# EAGLE board PL-N823-01 Analog Breakout (EAGLE 9.3.0)
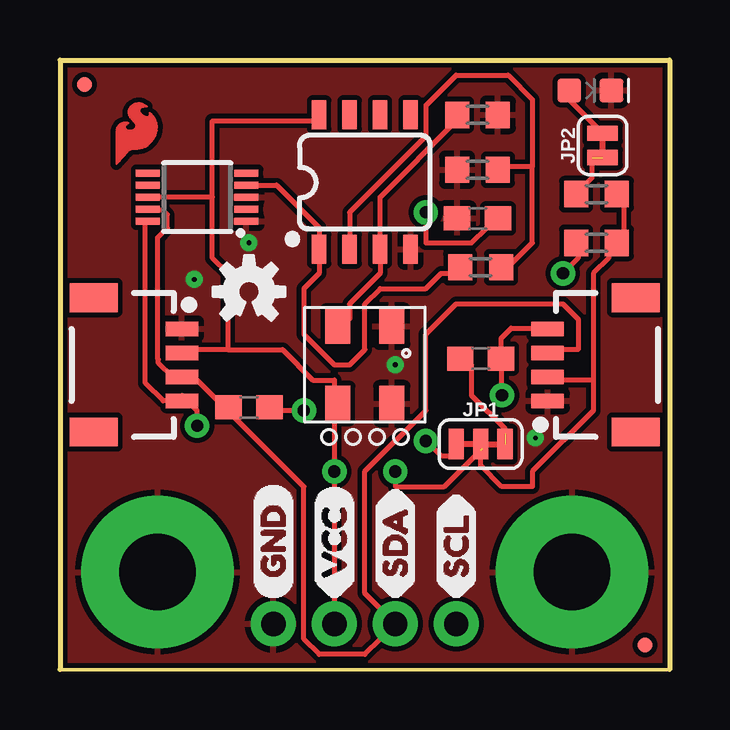
[diagram p0: board, top side]
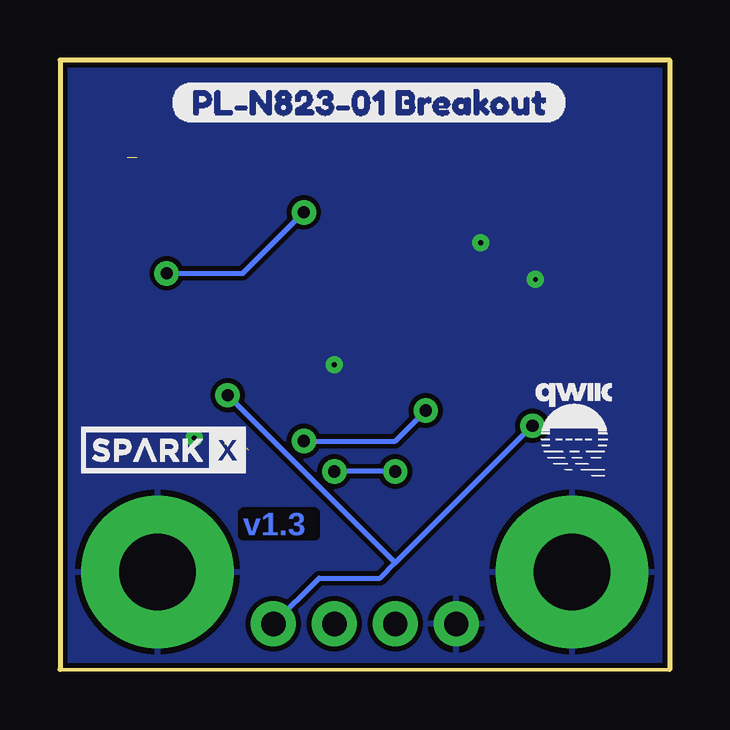
[diagram p1: board, bottom side, seen from below]

Size 25.4 x 25.4 mm. Coordinates in mm from the lower left corner, seen from the top.
Outline: 0,25.4 25.4,25.4 25.4,0 0,0 0,25.4
Copper layers (1*16): Top 0.035mm / dielectric 1.5mm / Bottom 0.035mm
Design rules "SparkFun": minimum track width 8mil, minimum drill 20mil, track to track 8mil, track to pad 8mil, pad to pad 8mil, via to via 8mil, smd to smd 8mil, copper to edge 8mil, drill to drill 8mil, minimum pad ring 12mil, minimum via ring 10mil, stop-mask expansion 4mil, vias tented up to drill 20mil, thermal gap 10mil

## Footprints (pad centres in the part's own frame; a part is rotated, then mirrored left to right if it is on the bottom)
C0603 = smd 1.1 x 1: 1 -0.85,0; 2 0.85,0
LED-0603 = smd 1 x 1: A -0.877,0; C 0.877,0
FIDUCIAL-MICRO = smd 0.635 x 0.635: 1 0,0
STANDOFF-ELECTRICAL = drill 3.2 pad 6.35: P1 0,0
1X04_1MM_RA = smd 0.6 x 1.35: 1 -1.5,0; 2 -0.5,0; 3 0.5,0; 4 1.5,0 | smd 1.2 x 2: NC1 2.8,-3.675; NC2 -2.8,-3.675
1X04_NO_SILK = drill 1.016 pad 1.88: 1 0,0; 2 2.54,0; 3 5.08,0; 4 7.62,0
SMT-JUMPER_3_2-NC_TRACE_SILK = smd 0.635 x 1.27: 1 -1.016,0; 2 0,0; 3 1.016,0
SMT-JUMPER_2_NC_TRACE_SILK = smd 0.635 x 1.27: 1 -0.508,0; 2 0.508,0
R0603 = smd 1 x 1.1: 1 -0.85,0; 2 0.85,0
0603 = smd 1.1 x 1: 1 -0.85,0; 2 0.85,0
MSOP10 = smd 0.3 x 1: 1 -1,-2.05; 2 -0.5,-2.05; 3 0,-2.05; 4 0.5,-2.05; 5 1,-2.05; 6 1,2.05; 7 0.5,2.05; 8 0,2.05; 9 -0.5,2.05; 10 -1,2.05
SO08 = smd 0.6 x 1.2: 1 -1.905,-2.8; 2 -0.635,-2.8; 3 0.635,-2.8; 4 1.905,-2.8; 5 1.905,2.8; 6 0.635,2.8; 7 -0.635,2.8; 8 -1.905,2.8
PL-N823-01 = smd 1.05 x 1.475: DRAIN -1.125,-1.613; GND@1 1.125,1.613; GND@2 1.125,-1.613; SOURCE -1.125,1.613

## Placement (x,y rotation side)
C2  1 uF  [C0603]  17.4,18.8 180 top
D1  BLUE  [LED-0603]  22.1,24.13 0 top
FD1  FIDUCIALUFIDUCIAL  [FIDUCIAL-MICRO]  1.02,24.38 0 top
FD2  FIDUCIALUFIDUCIAL  [FIDUCIAL-MICRO]  24.38,1.02 0 top
FRAME1  FRAME-LETTERNO_PACKAGE  [DUMMY]  20.32,3.17 0 top
H3  STANDOFF_ELECTRICAL  [STANDOFF-ELECTRICAL]  21.34,4.06 0 top
H4  STANDOFF_ELECTRICAL  [STANDOFF-ELECTRICAL]  4.06,4.06 0 top
J1  [1X04_1MM_RA]  5.08,12.7 270 top
J2  [1X04_NO_SILK]  16.51,1.91 180 top
J3  [1X04_1MM_RA]  20.32,12.7 90 top
JP1  JUMPER-SMT_3_2-NC_TRACE_SILK  [SMT-JUMPER_3_2-NC_TRACE_SILK]  17.53,9.4 0 top
JP2  JUMPER-SMT_2_NC_TRACE_SILK  [SMT-JUMPER_2_NC_TRACE_SILK]  22.61,21.84 90 top
R1  330  [R0603]  22.35,19.81 0 top
R2  10K  [R0603]  22.35,17.78 180 top
R3  47K  [R0603]  17.4,23.11 0 top
R4  2.49K  [R0603]  17.53,16.76 180 top
R5  1K  [R0603]  17.4,20.83 0 top
R6  2.2k  [0603]  7.87,10.92 180 top
R7  2.2k  [0603]  17.53,12.95 0 top
U1  ADS1015  [MSOP10]  5.71,19.68 90 top
U2  LMV358  [SO08]  12.7,20.32 0 top
U$1  PL-N823-01  [PL-N823-01]  12.7,12.7 0 top
U$2  [SFE_LOGO_FLAME_COPPER_EXPOSED_.1]  2.03,20.7 0 top
U$3  [GND0]  8.89,2.92 90 top
U$4  [SCL0]  16.51,2.92 90 top
U$5  [SDA0]  13.97,2.92 90 top
U$6  [VCC0]  11.43,2.92 90 top
U$7  [OSHW-LOGO-S]  7.87,15.75 0 top
U$8  [PL#N823#01_BREAKOUT0]  20.83,23.62 0 bottom
U$9  [QWIIC-LOGO-SMALL]  4.06,9.91 0 bottom
U$10  [SPARKX-SMALL]  21.08,9.14 0 bottom

## Library data of the parts
C2 = rcl; SPICEPREFIX: C
D1 = SparkFun-LED; PROD_ID: DIO-08575
FD1 FD2 U$2 U$7 = SparkFun-Aesthetics
FRAME1 = SparkFun-Aesthetics; DESIGNER: Nobody; VERSION: v01
H3 H4 = SparkFun-Hardware
J1 J3 = SparkFun-Connectors
J2 = SparkFun-Connectors; PROD_ID: CONN-09696
JP1 JP2 = SparkFun-Jumpers
R1-R5 = rcl; SPICEPREFIX: R
R6 R7 = SparkFun-Resistors; PROD_ID: RES-08272
U1 = SparkFun-IC-Conversion; PROD_ID: IC-12270
U2 = SparkFun-IC-Amplifiers; PROD_ID: IC-09657
U$1 = PL-N823-01
U$3 = buzzard_labels_GNS
U$4 = buzzard_labels_SCL
U$5 = buzzard_labels_SDA
U$6 = buzzard_labels_VCC
U$8 = buzzard_labels_pln82301
U$9 = Labels
U$10 = SparkX

## Nets
GND: C2.2 D1.C H3.P1 H4.P1 J1.1 J2.4 J3.1 R3.2 R5.1 U1.1 U1.3 U2.4 U$1.GND@1 U$1.GND@2
N$1: R4.1 R5.2 U2.2
N$2: C2.1 R2.2
N$3: JP2.1 R1.1
N$4: JP1.3 R7.1
N$5: JP1.1 R6.1
N$6: D1.A JP2.2
SCL: J1.4 J2.1 J3.4 R7.2 U1.10
SDA: J1.3 J2.2 J3.3 R6.2 U1.9
SIGNAL: R4.2 U1.4 U2.1
SOURCE: R3.1 U2.3 U$1.SOURCE
VCC: J1.2 J2.3 J3.2 JP1.2 R1.2 R2.1 U1.8 U2.8 U$1.DRAIN

## Tracks (layer width: path | path; a pad name or v marks a point on that pad's centre or on a via)
GND  (via drill 0.2)
  other vias: 13.97,12.7 19.81,9.65 5.59,16.26 7.87,17.78
  pour Top: 0,25.4 0,0 25.4,0 25.4,25.4
  pour Bottom: 0,0 0,25.4 25.4,25.4 25.4,0
N$1
  Top 0.203: 19.68,20.95 18.41,20.95 R5.2 | 19.68,20.95 19.68,17.78 18.41,16.51 R4.1 | U2.2 12.06,19.05 15.24,22.23 15.24,23.5 16.51,24.77 18.67,24.77 19.68,23.75 19.68,20.95
N$2  (via drill 0.51)
  Top 0.203: v15.24,19.05 15.24,17.78 17.14,17.78 17.78,18.41 C2.1 | v20.95,16.51 21.59,17.14 21.59,17.78 R2.2
  Bottom 0.203: v15.24,19.05 17.78,16.51 v20.95,16.51
N$3  (1 unrouted)
  Top 0.203: R1.1 22.17,20.48 22.17,21.34
N$4  (1 unrouted)
  Top 0.203: R7.1 17.14,12.7 17.14,11.43 18.54,10.03 18.54,9.83 | 18.41,8.89 JP1.3
N$5  (via drill 0.51)
  Top 0.203: v10.16,10.79 8.89,10.79 R6.1 | v15.24,9.53 15.88,8.89 16.51,8.89 JP1.1
  Bottom 0.203: v10.16,10.79 11.43,9.53 v15.24,9.53
N$6
  Top 0.203: JP2.2 21.22,23.74 D1.A
SCL  (via drill 0.51)
  Top 0.203: v5.71,10.16 5.71,10.79 5.08,11.43 J1.4 4.29,11.2 3.56,11.94 3.56,18.58 U1.10 | v18.41,11.43 18.41,12.7 R7.2 18.38,13.8 18.8,14.22 20.3,14.22 J3.4
  Bottom 0.203: 11.43,4.45 12.06,3.81 14.61,3.81 J2.1 | 11.43,4.45 v5.71,10.16 | 11.43,4.45 v18.41,11.43
SDA
  Top 0.203: 6.99,10.79 5.71,12.06 5.08,12.06 J1.3 4.67,12.2 4.1,12.77 4.1,12.92 4.06,12.95 4.06,18 4.47,18.41 4.47,18.96 4.29,19.14 3.71,19.14 U1.9 | 13.34,2.54 12.7,3.17 12.7,8.26 15.24,10.79 15.24,13.97 16.51,15.24 20.95,15.24 21.59,14.61 21.59,13.34 20.32,13.34 J3.3 | 6.99,10.79 10.16,7.62 10.16,1.27 10.79,0.64 12.7,0.64 13.34,1.27 13.34,2.54 | 6.99,10.79 R6.2 | 13.34,2.54 J2.2
SIGNAL
  Top 0.203: R4.2 16.51,16.51 15.88,16.51 15.24,15.88 13.34,15.88 12.7,15.24 12.7,13.34 12.06,12.7 11.43,12.7 10.16,13.97 10.16,15.88 10.79,16.51 U2.1 10.79,18.41 9.03,20.18 U1.4
SOURCE
  Top 0.203: R3.1 16.51,22.86 13.34,19.68 U2.3 13.34,16.51 12.06,15.24 12.06,14.61 U$1.SOURCE
VCC  (via drill 0.51)  (1 unrouted)
  Top 0.203: R1.2 23.5,19.68 23.5,17.78 R2.1 22.86,17.78 22.86,17.14 22.23,16.51 22.23,12.06 | 22.23,12.06 20.32,12.06 J3.2 | 22.23,12.06 22.23,10.79 19.68,8.26 19.68,7.62 18.41,7.62 17.53,8.51 17.53,9.14 16,7.62 13.97,7.62 v13.97,8.26 | 6.35,19.68 U1.8 | 6.35,19.68 6.35,17.14 6.99,16.51 6.99,13.34 | 6.35,19.68 6.35,22.86 10.79,22.86 U2.8 | 6.99,13.34 5.08,13.34 J1.2 | J2.3 v11.43,8.26 11.43,10.79 U$1.DRAIN 11.43,11.43 11.43,12.06 10.54,12.06 9.27,13.34 6.99,13.34 | 17.61,9.23 JP1.2
  Bottom 0.203: v11.43,8.26 v13.97,8.26

## Text on the board
Bottom: v1.3